# EAGLE board basestation (EAGLE 7.3.0)
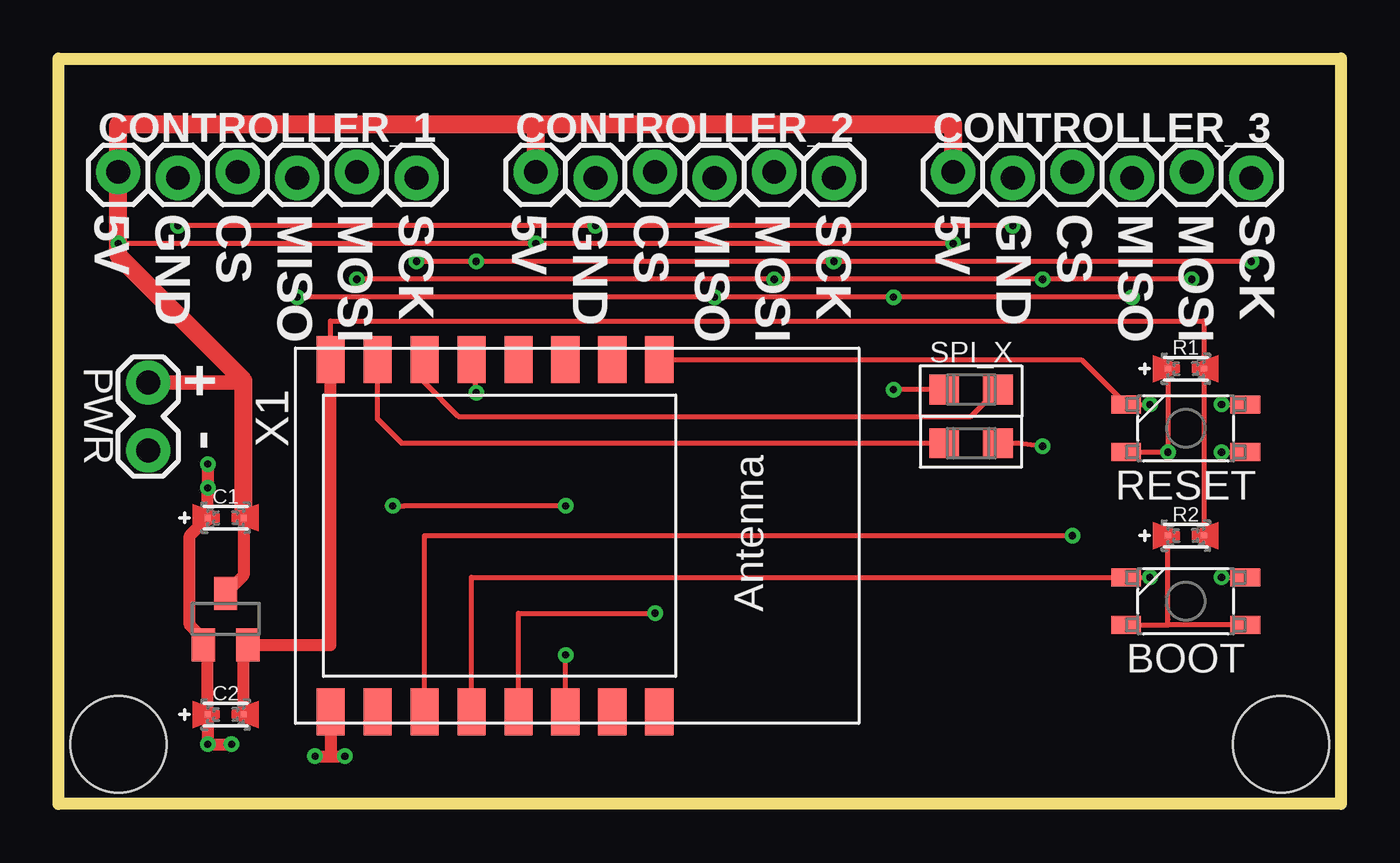
[diagram p0: board, top side]
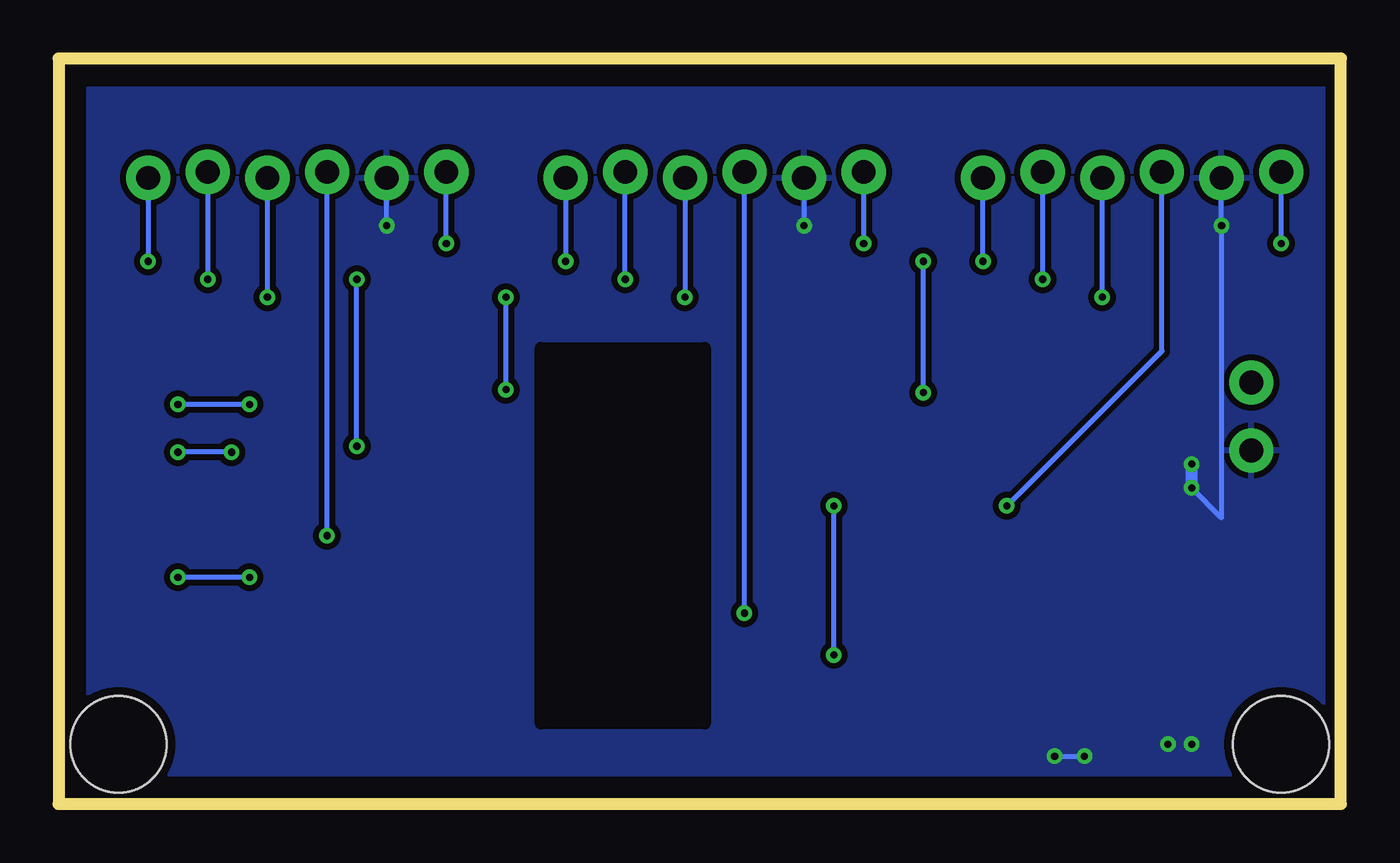
[diagram p1: board, bottom side, seen from below]

Size 54.61 x 31.75 mm. Coordinates in mm from the lower left corner, seen from the top.
Outline: 0,0 0,31.75 54.61,31.75 54.61,0 0,0
Copper layers (1*16): Top 0.0356mm / dielectric 1.5011mm / Bottom 0.0356mm
Design rules "LaenPCBOrder-tented": minimum track width 6mil, minimum drill 13mil, track to track 6mil, track to pad 6mil, pad to pad 6mil, via to via 6mil, smd to smd 0mil, copper to edge 15mil, drill to drill 6mil, minimum pad ring 7mil, minimum via ring 7mil, stop-mask expansion 4mil, vias tented up to drill 25mil, thermal gap 10mil
Holes 4.1 mm at 2.54,2.54 52.07,2.54

## Footprints (pad centres in the part's own frame; a part is rotated, then mirrored left to right if it is on the bottom)
BUTTON-PJRC = smd 1.27 x 0.762: A1 -2.54,-1.016; A2 2.54,-1.016; B1 -2.54,1.016; B2 2.54,1.016
0402-0603-0805-UNIVERSAL = smd 0.254 x 0.254: + -0.762,0; - 0.762,0
1X06_LOCK = drill 1.016 pad 1.88: 1 0,0; 2 2.54,-0.254; 3 5.08,0; 4 7.62,-0.254; 5 10.16,0; 6 12.7,-0.254
1X02_LOCK = drill 1.016 pad 1.88: 1 -0.178,0; 2 2.718,0
UART_SWITCHER_0603 = smd 1.27 x 1.27: RX_A -1.143,-1.143; RX_B -1.143,1.143; TX_A 1.143,1.143; TX_B 1.143,-1.143
SOT23 = smd 1 x 1.4: 1 -0.95,-1.1; 2 0.95,-1.1; 3 0,1.1
ESP-12 = smd 2 x 1.2: 1 -7.5,4.5; 2 -7.5,2.5; 3 -7.5,0.5; 4 -7.5,-1.5; 5 -7.5,-3.5; 6 -7.5,-5.5; 7 -7.5,-7.5; 8 -7.5,-9.5; 9 7.5,-9.5; 10 7.5,-7.5; 11 7.5,-5.5; 12 7.5,-3.5; 13 7.5,-1.5; 14 7.5,0.5; 15 7.5,2.5; 16 7.5,4.5

## Placement (x,y rotation side)
BOOT  BUTTONPJRC  [BUTTON-PJRC]  48.01,8.64 0 top
C1  [0402-0603-0805-UNIVERSAL]  7.11,12.19 0 top
C2  [0402-0603-0805-UNIVERSAL]  7.11,3.81 0 top
CONTROLLER_1  [1X06_LOCK]  15.24,26.67 180 top
CONTROLLER_2  [1X06_LOCK]  33.02,26.67 180 top
CONTROLLER_3  [1X06_LOCK]  50.8,26.67 180 top
PWR  M02LOCK  [1X02_LOCK]  3.81,15.24 90 top
R1  [0402-0603-0805-UNIVERSAL]  48.01,18.54 0 top
R2  [0402-0603-0805-UNIVERSAL]  48.01,11.43 0 top
RESET  BUTTONPJRC  [BUTTON-PJRC]  48.01,16 0 top
SPI_X  UART_SWITCHER0603  [UART_SWITCHER_0603]  38.86,16.51 0 top
U$1  VOLTAGE-REGULATORMCP1703  [SOT23]  7.11,7.87 0 top
X1  [ESP-12]  21.08,11.43 270 top

## Library data of the parts
BOOT C1 C2 CONTROLLER_1-CONTROLLER_3 PWR R1 R2 RESET SPI_X U$1 = tekdemo
X1 = adafruit

## Nets
3.3V: C2.- R1.- R2.- U$1.2 X1.8
5V: C1.- CONTROLLER_1.6 CONTROLLER_2.6 CONTROLLER_3.6 PWR.2 U$1.3
BOOT: BOOT.B1 BOOT.B2 X1.12
CTRL1: CONTROLLER_1.4 X1.14
CTRL2: CONTROLLER_2.4 X1.13
CTRL3: CONTROLLER_3.4 X1.11
GND: C1.+ C2.+ CONTROLLER_1.5 CONTROLLER_2.5 CONTROLLER_3.5 PWR.1 U$1.1 X1.9
MISO: CONTROLLER_1.3 CONTROLLER_2.3 CONTROLLER_3.3 SPI_X.RX_B
MISO-ESP: SPI_X.TX_A X1.6
MOSI: CONTROLLER_1.2 CONTROLLER_2.2 CONTROLLER_3.2 SPI_X.TX_B
MOSI-ESP: SPI_X.RX_A X1.7
N$3: R1.+ RESET.A1 RESET.A2
N$4: BOOT.A1 BOOT.A2 R2.+
RESET: RESET.B1 RESET.B2 X1.1
SCK: CONTROLLER_1.1 CONTROLLER_2.1 CONTROLLER_3.1 X1.5
SS(NC): X1.10

## Tracks (layer width: path | path; a pad name or v marks a point on that pad's centre or on a via)
3.3V
  Top 0.203: X1.8 11.58,20.57 48.77,20.57 R1.- R2.-
  Top 0.508: C2.- 7.87,6.59 U$1.2 11.58,6.77 X1.8
5V  (via drill 0.3)
  Top 0.203: v38.1,23.88 v20.32,23.88 v2.54,23.88
  Top 0.508: C1.- 7.87,9.74 U$1.3
  Top 0.61: PWR.2 7.87,17.96 7.87,17.53
  Top 0.762: C1.- 7.87,17.53 7.87,18.03 2.54,23.37 CONTROLLER_1.6 2.54,28.96 20.32,28.96 | 20.32,28.96 38.1,28.96 CONTROLLER_3.6 | 20.32,28.96 20.32,26.67
  Bottom 0.203: v38.1,23.88 CONTROLLER_3.6 | v20.32,23.88 CONTROLLER_2.6 | v2.54,23.88 CONTROLLER_1.6
BOOT  (via drill 0.3)
  Top 0.203: X1.12 17.58,9.65 BOOT.B1 v46.48,9.65 | v49.53,9.65 BOOT.B2
  Bottom 0.203: v46.48,9.65 v49.53,9.65
CTRL1  (via drill 0.3)
  Top 0.203: X1.14 v21.58,6.35 v21.59,6.35 | v21.59,12.7 14.73,12.7 v14.22,12.7 13.97,12.7
  Bottom 0.203: v21.59,6.35 v21.59,12.7 | CONTROLLER_1.4 7.62,19.3 v14.22,12.7
CTRL2  (via drill 0.3)
  Top 0.203: X1.13 19.58,8.13 v25.4,8.13
  Bottom 0.203: v25.4,8.13 CONTROLLER_2.4
CTRL3  (via drill 0.3)
  Top 0.203: X1.11 15.58,11.43 v43.18,11.43
  Bottom 0.203: v43.18,11.43 CONTROLLER_3.4
GND  (via drill 0.3)
  Top 0.203: v40.64,24.64 v22.86,24.64 v5.08,24.64 | 11.58,2.03 v12.19,2.03
  Top 0.508: v7.37,2.54 v6.35,2.54 C2.+ 6.35,6.59 U$1.1 6.16,7.05 5.59,7.62 5.59,11.43 C1.+ v6.35,13.46 v6.35,14.48 | X1.9 11.58,2.03 | v10.92,2.03 v12.19,2.03
  Bottom 0.203: v40.64,24.64 CONTROLLER_3.5 | CONTROLLER_2.5 v22.86,24.64 | CONTROLLER_1.5 v5.08,24.64 5.08,12.19 v6.35,13.46 | v12.19,2.03 v10.92,2.03
  Bottom 0.508: v6.35,13.46 v6.35,14.48
  pour Bottom (isolate 0.254): 0,30.48 0,1.27 53.34,1.27 53.34,30.48
MISO  (via drill 0.3)
  Top 0.203: v45.72,21.59 v35.56,21.59 v27.94,21.59 v10.16,21.59 | SPI_X.RX_B v35.56,17.65
  Bottom 0.203: v35.56,17.65 v35.56,21.59 | v45.72,21.59 CONTROLLER_3.3 | v10.16,21.59 CONTROLLER_1.3 | CONTROLLER_2.3 v27.94,21.59
MISO-ESP
  Top 0.203: SPI_X.TX_A 38.86,16.51 17.02,16.51 15.58,17.95 X1.6
MOSI  (via drill 0.3)
  Top 0.203: v48.26,22.35 v41.91,22.35 v30.48,22.35 v12.7,22.35 | SPI_X.TX_B 40.89,15.37 v41.91,15.24
  Bottom 0.203: v41.91,15.24 v41.91,22.35 | CONTROLLER_3.2 v48.26,22.35 | v30.48,22.35 CONTROLLER_2.2 | v12.7,22.35 CONTROLLER_1.2
MOSI-ESP
  Top 0.203: SPI_X.RX_A 14.61,15.37 13.58,16.39 X1.7
N$3  (via drill 0.3)
  Top 0.203: R1.+ v47.24,14.99 RESET.A1 | v49.53,14.99 RESET.A2
  Bottom 0.203: v47.24,14.99 v49.53,14.99
N$4
  Top 0.203: BOOT.A1 47.24,7.62 | R2.+ 47.24,7.87 47.24,7.62 | BOOT.A2 47.24,7.62
RESET  (via drill 0.3)
  Top 0.203: X1.1 43.55,18.93 RESET.B1 v46.48,17.02 | v49.53,17.02 RESET.B2
  Bottom 0.203: v46.48,17.02 v49.53,17.02
SCK  (via drill 0.3)
  Top 0.203: v50.8,23.11 v33.02,23.11 v17.78,23.11 v15.24,23.11 | X1.5 v17.78,17.53
  Bottom 0.203: CONTROLLER_3.1 v50.8,23.11 | CONTROLLER_2.1 v33.02,23.11 | v15.24,23.11 CONTROLLER_1.1 | v17.78,17.53 v17.78,23.11

## Text on the board
tPlace: + | -
tNames: SCK / MOSI / MISO / CS / GND / 5V | SCK / MOSI / MISO / CS / GND / 5V | SCK / MOSI / MISO / CS / GND / 5V